# EAGLE board mv-uart (EAGLE 7.6.0)
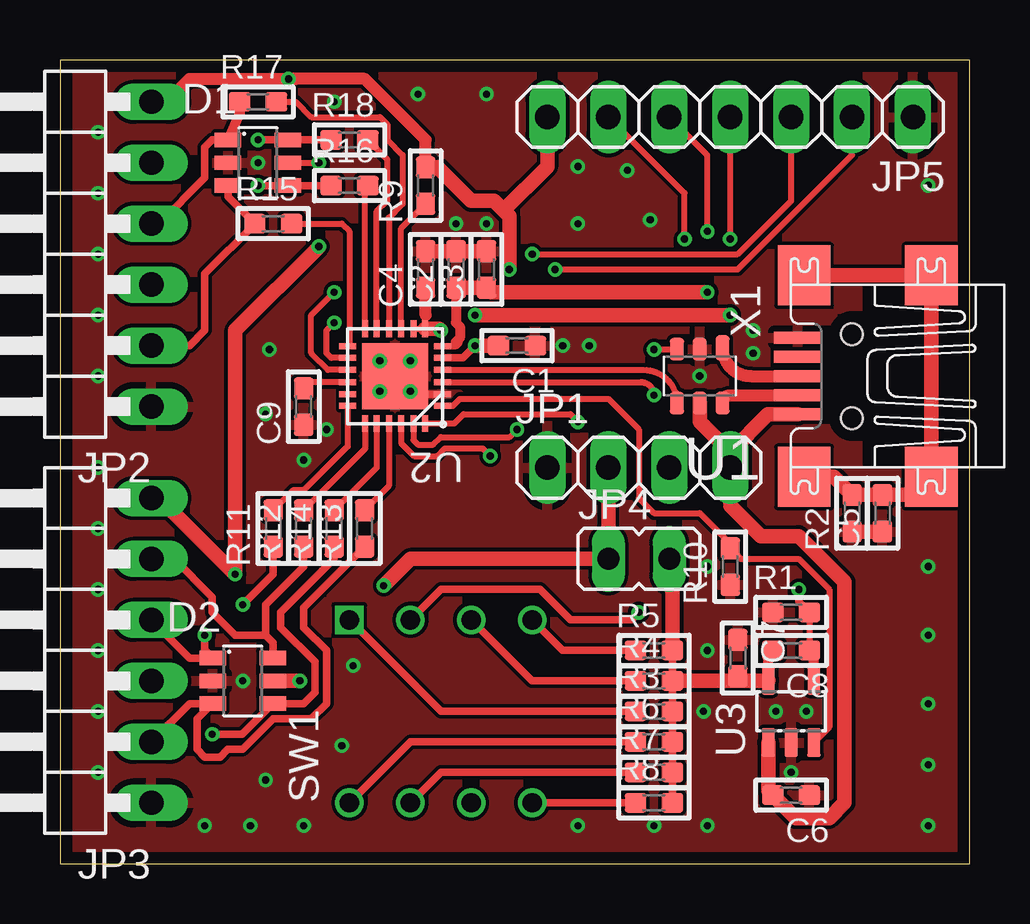
[diagram p0: board, top side]
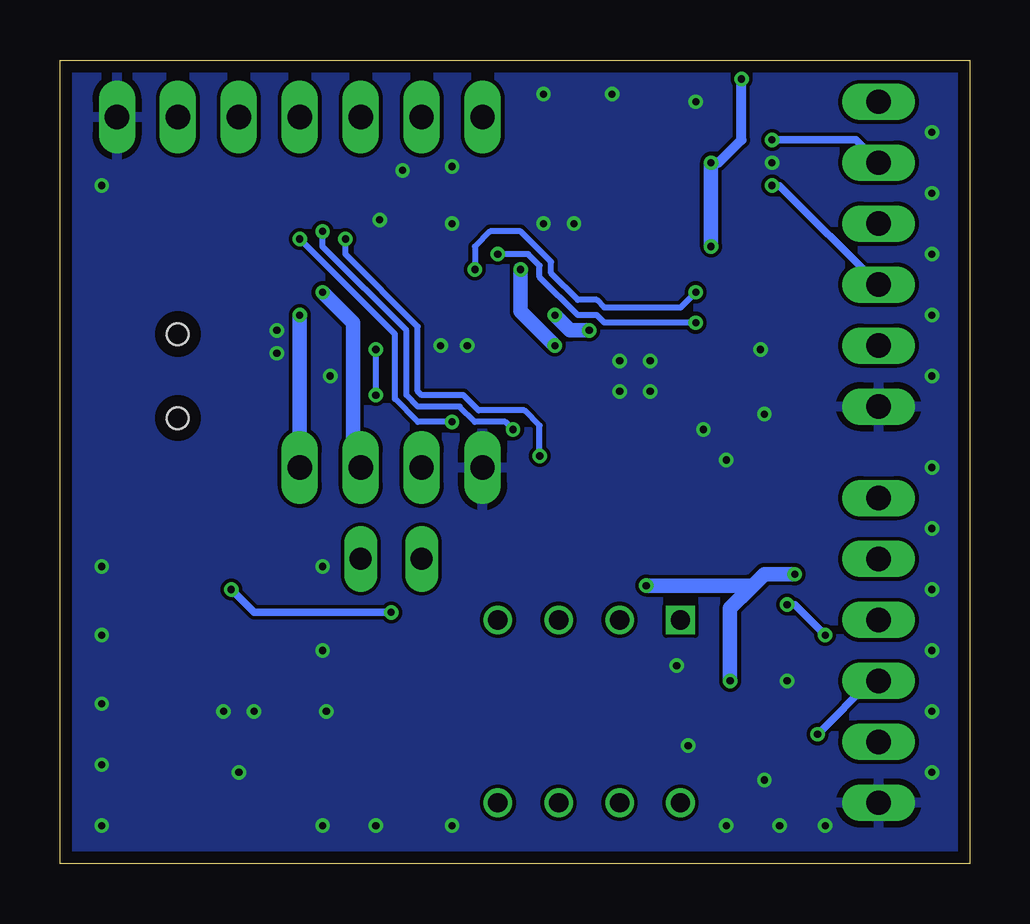
[diagram p1: board, bottom side, seen from below]

Size 37.94 x 33.49 mm. Coordinates in mm from the lower left corner, seen from the top.
Outline: 0,0 37.94,0 37.94,33.49 0,33.49 0,0
Copper layers (1*16): Top 0.035mm / dielectric 1.55mm / Bottom 0.035mm
Design rules "sysmocom-basista-4layer-prototype *": minimum track width 0.15mm, minimum drill 0.3mm, track to track 0.15mm, track to pad 0.15mm, pad to pad 0.15mm, via to via 0.15mm, smd to smd 0.15mm, copper to edge 0.5mm, drill to drill 0.36mm, minimum pad ring 0.15mm, minimum via ring 0.15mm, stop-mask expansion 0.15mm, vias tented up to drill 0mil, thermal gap 10mil

## Footprints (pad centres in the part's own frame; a part is rotated, then mirrored left to right if it is on the bottom)
_0603 = smd 0.9 x 0.8: 1 -0.762,0; 2 0.762,0
WE-TVS_SOT23-6L = smd 0.6 x 1.1: 1 -0.95,-1.25; 2 0,-1.25; 3 0.95,-1.25; 4 0.95,1.25; 5 0,1.25; 6 -0.95,1.25
1X04 = drill 1.016 long: 1 -3.81,0; 2 -1.27,0; 3 1.27,0; 4 3.81,0
1X06/90 = drill 1.016 long: 1 -6.35,-3.81; 2 -3.81,-3.81; 3 -1.27,-3.81; 4 1.27,-3.81; 5 3.81,-3.81; 6 6.35,-3.81
JP1 = drill 0.914 long: 1 0,-1.27; 2 0,1.27
1X07 = drill 1.016 long: 1 -7.62,0; 2 -5.08,0; 3 -2.54,0; 4 0,0; 5 2.54,0; 6 5.08,0; 7 7.62,0
DIP_SP6T = drill 0.8 square: 1 -3.81,3.81 | drill 0.8: 2 1.27,3.81; 3 3.81,3.81; 4 -3.81,-3.81; 5 -1.27,-3.81; 6 3.81,-3.81; C -1.27,3.81; C2 1.27,-3.81
TSOP-6 = smd 0.6 x 1.05: 1 -0.95,-1.175 | smd 0.6 x 0.95: 2 0,-1.125; 3 0.95,-1.125; 4 0.95,1.125; 5 0,1.125; 6 -0.95,1.125
QFN24_4X4 = smd 0.7 x 0.25: 1 -1.975,1.245; 2 -1.975,0.762; 3 -1.975,0.254; 4 -1.975,-0.254; 5 -1.975,-0.762; 6 -1.975,-1.245; 13 1.975,-1.245; 14 1.975,-0.762; 15 1.975,-0.254; 16 1.975,0.254; 17 1.975,0.762; 18 1.975,1.245 | smd 0.25 x 0.7: 7 -1.245,-1.975; 8 -0.762,-1.975; 9 -0.254,-1.975; 10 0.254,-1.975; 11 0.762,-1.975; 12 1.245,-1.975; 19 1.245,1.975; 20 0.762,1.975; 21 0.254,1.975; 22 -0.254,1.975; 23 -0.762,1.975; 24 -1.245,1.975 | smd 2.75 x 2.75: 25 0,0
SOT23L = smd 0.55 x 1.2: 1 -0.95,-1.3; 2 0,-1.3; 3 0.95,-1.3; 4 0.95,1.3; 5 -0.95,1.3
UX60-MB-5ST = smd 2 x 0.5: 1 2.25,1.6; 2 2.25,0.8; 3 2.25,0; 4 2.25,-0.8; 5 2.25,-1.6 | smd 2.2 x 2.5: M1 -3.3,-4.2; M2 -3.3,4.2; M3 2,4.2; M4 2,-4.2 | hole 0.9: 0,-1.75; 0,1.75

## Placement (x,y rotation side)
C1  100n  [_0603]  19.05,21.59 180 top
C2  100n  [_0603]  16.51,24.77 90 top
C3  2.2u  [_0603]  17.78,24.77 90 top
C4  1u  [_0603]  15.24,24.77 90 top
C5  100n  [_0603]  34.29,14.61 90 top
C6  1u  [_0603]  30.48,2.86 180 top
C7  1u  [_0603]  28.26,8.57 270 top
C8  1n  [_0603]  30.48,8.89 180 top
C9  4.7u  [_0603]  10.16,19.05 90 top
D1  WE-TVS_824013  [WE-TVS_SOT23-6L]  8.26,29.21 270 top
D2  WE-TVS_824013  [WE-TVS_SOT23-6L]  7.62,7.62 270 top
JP1  [1X04]  24.13,16.51 0 top
JP2  [1X06/90]  0,25.4 90 top
JP3  [1X06/90]  0,8.89 90 top
JP4  [JP1]  24.13,12.7 270 top
JP5  [1X07]  27.94,31.11 180 top
R1  18k  [_0603]  30.48,10.48 0 top
R2  1M  [_0603]  33.02,14.61 90 top
R3  22.6k  [_0603]  24.77,6.35 0 top
R4  34k  [_0603]  24.77,7.62 0 top
R5  38.3k  [_0603]  24.77,8.89 0 top
R6  45.3k  [_0603]  24.77,5.08 0 top
R7  49.9k  [_0603]  24.77,3.81 0 top
R8  56.2k  [_0603]  24.77,2.54 0 top
R9  4.7k  [_0603]  15.24,28.26 90 top
R10  10k  [_0603]  27.94,12.38 90 top
R11  47  [_0603]  8.89,13.97 90 top
R12  47  [_0603]  10.16,13.97 90 top
R13  47  [_0603]  12.7,13.97 90 top
R14  47  [_0603]  11.43,13.97 90 top
R15  47  [_0603]  8.89,26.67 0 top
R16  47  [_0603]  12.06,28.26 0 top
R17  47  [_0603]  8.26,31.75 0 top
R18  47  [_0603]  12.06,30.16 0 top
SW1  DIP_SP6T  [DIP_SP6T]  15.88,6.35 0 top
U1  IP4234CZ6  [TSOP-6]  26.67,20.32 180 top
U2  CP2105-GM  [QFN24_4X4]  13.97,20.32 180 top
U3  LDO_SHD_ADJ-AP2127K-ADJ  [SOT23L]  30.48,6.35 0 top
X1  MINI-USB-SHIELD-UX60-MB-5ST  [UX60-MB-5ST]  33.02,20.32 180 top

## Library data of the parts
C1-C9 R1-R18 = rc-sysmocom
D1 D2 = Wuerth_Elektronik_eiSos_V6_20140807
JP1-JP3 JP5 = pinhead
JP4 = jumper
SW1 = laforge
U1 = laforge; OC_DIGIKEY: 568-5869-1-ND
U2 = usb-uart; OC_DIGIKEY: 336-2009-5-ND
U3 = ldo
X1 = con-hirose; OC_FARNELL: unknown; OC_NEWARK: unknown

## Nets
!SUSPEND: R10.2 U2.1 U3.3
_USB_DN: U1.6 X1.2
_USB_DP: U1.1 X1.3
CTS_ECI: D1.1 JP2.4 R17.1
CTS_SCI: D2.1 JP3.4 R11.1
GND: C1.1 C2.2 C3.2 C4.2 C5.1 C6.1 C7.1 C9.1 D1.2 D2.2 JP1.1 JP2.1 JP3.1 JP5.1 R1.1 R2.1 R10.1 U1.2 U2.2 U2.25 U3.2 X1.5
GPIO.0_ECI: JP5.2 U2.15
GPIO.0_SCI: JP5.4 U2.24
GPIO.1_ECI: JP5.3 U2.14
GPIO.1_SCI: JP5.5 U2.23
GPIO.2_SCI: JP5.6 U2.22
N$1: R3.1 SW1.1
N$2: R4.1 SW1.2
N$3: R5.1 SW1.3
N$4: R6.1 SW1.4
N$5: C5.2 R2.2 X1.M1 X1.M2 X1.M3 X1.M4
N$6: R7.1 SW1.5
N$7: R8.1 SW1.6
N$8: R9.1 U2.9
N$9: C9.2 U2.16
N$10: R11.2 U2.18
N$11: R12.2 U2.19
N$12: R13.2 U2.21
N$13: R14.2 U2.20
N$14: R15.2 U2.13
N$15: C8.1 R1.2 SW1.C U3.4
N$16: R16.2 U2.12
N$17: R17.2 U2.10
N$18: R18.2 U2.11
RTS_ECI: D1.6 JP2.5 R18.1
RTS_SCI: D2.6 JP3.5 R12.1
RXD_ECI: D1.4 JP2.3 R16.1
RXD_SCI: D2.4 JP3.3 R14.1
TXD_ECI: D1.3 JP2.2 R15.1
TXD_SCI: D2.3 JP3.2 R13.1
USB_DN: U1.4 U2.4
USB_DP: U1.3 U2.3
USB_VBUS: C4.1 C6.2 JP1.4 U1.5 U2.7 U2.8 U3.1 X1.1
V_ADJ: C7.2 C8.2 JP4.2 R3.2 R4.2 R5.2 R6.2 R7.2 R8.2 U3.5
VDD_3V45: C2.1 C3.1 JP1.3 U2.6
VIO: C1.2 D1.5 D2.5 JP1.2 JP2.6 JP3.6 JP4.1 JP5.7 R9.2 U2.5

## Tracks (layer width: path | path; a pad name or v marks a point on that pad's centre or on a via)
!SUSPEND
  Top 0.254: U2.1 16.38,19.07 16.67,19.37 22.86,19.37 24.13,18.1 24.13,15.24 24.77,14.61 26.67,14.61 27.94,13.34 R10.2 28.38,12.7 30.8,12.7 32.07,11.43 32.07,5.69 U3.3
_USB_DN
  Top 0.5: U1.6 arc-90 27.95,19.52 X1.2
_USB_DP
  Top 0.5: U1.1 arc90 28.8,20.32 X1.3
CTS_ECI
  Top 0.307: JP2.4 4.13,26.67 6.03,28.57 6.03,29.84 6.35,30.16 D1.1
  Top 0.406: R17.1 7.49,31.28 D1.1
CTS_SCI  (via drill 0.3)
  Top 0.307: JP3.4 5.4,8.57 D2.1 6.03,8.91 v6.03,9.53 | v7.62,10.79 8.89,12.06 R11.1
  Bottom 0.307: v6.03,9.53 7.3,10.79 v7.62,10.79
GND  (via drill 0.3)
  Top 0.15: U2.25 v14.61,19.68
  Top 0.307: U2.2 14.73,19.56 v14.61,19.68
  Top 0.61: C5.1 R2.1 | C3.2 C2.2 C4.2
  other vias: 7.62,7.62 10.16,1.59 7.94,1.59 6.03,1.59 1.59,3.81 1.59,6.35 1.59,8.89 1.59,11.43 1.59,13.97 1.59,16.51 1.59,20.32 1.59,22.86 1.59,25.4 1.59,27.94 1.59,30.48 8.26,29.21 11.43,31.75 21.59,1.59 24.77,1.59 26.99,1.59 36.2,1.59 36.2,4.13 36.2,6.67 36.2,9.53 36.2,12.38 14.92,32.07 17.78,32.07 36.2,28.26 31.11,6.35 29.84,6.35 30.48,3.81 26.99,12.38 26.99,8.89 20.95,21.59 16.51,26.67 17.78,26.67 26.67,20.32 28.89,21.27 28.89,22.23 10.16,16.83 11.11,18.1 21.59,29.05 23.65,28.89 24.61,26.83 21.59,26.67 8.73,21.43 8.57,18.73 12.22,8.26 11.75,4.92 8.57,3.49 26.83,6.35 22.07,21.59 13.34,19.68 13.34,20.95 14.61,20.95
  pour Top: 0,33.66 38.1,33.66 38.1,0 0,0
  pour Bottom: 0,33.66 38.1,33.66 38.1,0 0,0
GPIO.0_ECI  (via drill 0.3)
  Top 0.254: U2.15 11.18,20.57 10.48,21.27 10.48,22.86 v11.43,23.81 | v20.64,24.77 28.26,24.77 33.02,29.53 JP5.2
  Bottom 0.254: v11.43,23.81 12.06,23.18 15.24,23.18 15.56,23.5 16.35,23.5 17.46,24.61 17.46,25.08 18.73,26.35 20,26.35 20.64,25.72 v20.64,24.77
GPIO.0_SCI  (via drill 0.3)
  Top 0.254: U2.24 16.44,18.34 16.83,18.73 21.27,18.73 v21.59,18.41 | v27.94,26.04 JP5.4
  Bottom 0.254: v21.59,18.41 23.02,18.41 23.97,19.37 23.97,22.07 v27.94,26.04
GPIO.1_ECI  (via drill 0.3)
  Top 0.254: U2.14 11.3,21.08 11.11,21.27 11.11,22.23 v11.43,22.54 | v19.68,25.4 28.26,25.4 30.48,27.62 JP5.3
  Bottom 0.254: v11.43,22.54 15.24,22.54 15.56,22.86 16.35,22.86 17.94,24.45 17.94,24.92 18.41,25.4 v19.68,25.4
GPIO.1_SCI  (via drill 0.3)
  Top 0.254: U2.23 14.73,17.65 14.92,17.46 15.56,17.46 15.88,17.78 18.73,17.78 v19.05,18.1 | v26.99,26.35 26.99,29.53 JP5.5
  Bottom 0.254: v19.05,18.1 19.37,18.41 20.64,18.41 21.27,19.05 23.02,19.05 23.5,19.53 23.5,22.23 26.99,25.72 v26.99,26.35
GPIO.2_SCI  (via drill 0.3)
  Top 0.254: U2.22 14.22,17.53 14.76,16.99 15.72,16.99 16.03,17.3 17.62,17.3 v17.94,16.99 | v26.04,26.04 26.04,27.94 JP5.6
  Bottom 0.254: v17.94,16.99 17.94,18.26 18.57,18.89 20.48,18.89 21.11,19.53 22.86,19.53 23.02,19.68 23.02,22.38 26.04,25.4 v26.04,26.04
N$1
  Top 0.307: SW1.1 15.88,6.35 R3.1
N$2
  Top 0.307: SW1.2 19.68,7.62 R4.1
N$3
  Top 0.307: SW1.3 20.95,8.89 R5.1
N$4
  Top 0.307: SW1.4 14.61,5.08 R6.1
N$5
  Top 0.61: X1.M3 32.27,16.12 R2.2 C5.2 35.57,15.37 X1.M2 X1.M1 X1.M4
N$6
  Top 0.307: SW1.5 15.88,3.81 R7.1
N$7
  Top 0.307: SW1.6 R8.1
N$8
  Top 0.254: U2.9 14.22,26.48 R9.1
N$9
  Top 0.254: U2.16 10.41,20.07 C9.2
N$10
  Top 0.254: U2.18 11.99,17.39 10.16,15.56 9.72,15.56 R11.2
N$11
  Top 0.254: U2.19 12.72,17.3 R12.2
N$12
  Top 0.254: U2.21 13.72,15.75 R13.2
N$13
  Top 0.254: U2.20 13.21,16.51 R14.2
N$14
  Top 0.254: R15.2 11.75,26.67 12.06,26.35 12.06,21.64 U2.13
N$15  (via drill 0.3)
  Top 0.254: R1.2 C8.1
  Top 0.307: SW1.C 15.88,11.43 20,11.43 21.27,10.16 23.81,10.16 v24.13,10.48 | v30.8,11.43 30.8,10.92 R1.2
  Top 0.406: U3.4 31.43,8.7 C8.1
  Bottom 0.307: v24.13,10.48 29.84,10.48 v30.8,11.43
N$16
  Top 0.254: U2.12 12.72,28.16 arc-90 R16.2
N$17
  Top 0.254: R17.2 9.84,31.75 10.48,31.11 13.34,31.11 13.65,30.8 13.65,30.16 14.29,29.53 14.29,27.5 13.72,26.92 U2.10
N$18
  Top 0.254: U2.11 13.21,27.18 13.65,27.62 13.65,29.34 R18.2
RTS_ECI  (via drill 0.3)
  Top 0.307: R18.1 D1.6 v8.26,30.16
  Bottom 0.307: JP2.5 4.76,30.16 v8.26,30.16
RTS_SCI
  Top 0.307: JP3.5 4.76,12.7 6.35,11.11 6.35,10.48 7.3,9.53 8.57,9.53 | 8.57,9.53 8.89,9.21 8.89,8.59 D2.6 | 8.57,9.53 8.57,10.79 10.16,12.38 R12.1
RXD_ECI  (via drill 0.3)
  Top 0.307: R16.1 D1.4 v8.26,28.26
  Bottom 0.307: JP2.3 7.94,28.26 v8.26,28.26
RXD_SCI  (via drill 0.3)
  Top 0.307: v6.35,5.4 7.6,5.4 D2.4 10.16,6.67 10.64,7.14 10.64,8.41 9.21,9.84 9.21,10.48 11.43,12.7 R14.1
  Bottom 0.307: JP3.3 4.13,7.62 v6.35,5.4
TXD_ECI
  Top 0.307: D1.3 7,27.79 R15.1 6.03,24.57 6.03,22.23 5.4,21.59 JP2.2
TXD_SCI
  Top 0.307: JP3.2 5.4,6.67 D2.3 6.35,6.67 5.71,6.03 5.71,4.76 6.03,4.45 6.67,4.45 6.99,4.76 7.62,4.76 8.89,6.03 10.48,6.03 11.11,6.67 11.11,8.89 10.16,9.84 10.16,10.67 R13.1
USB_DN
  Top 0.254: U2.4 24.34,20.57 arc-90 U1.4
USB_DP  (via drill 0.3)
  Top 0.254: U2.3 24.23,20.07 arc-90 v24.77,19.53 | v24.77,21.43 U1.3
  Bottom 0.254: v24.77,19.53 v24.77,21.43
USB_VBUS  (via drill 0.3)
  Top 0.254: 15.24,22.86 15.21,22.54 U2.7 U2.8
  Top 0.5: 15.24,22.86 C4.1
  Top 0.61: X1.1 29.52,18.72 27.94,17.14 | 27.94,17.14 JP1.4 27.94,14.92 29.21,13.65 30.8,13.65 32.7,11.75 32.7,2.54 32.07,1.91 30.67,1.91 C6.2 29.53,3.05 U3.1 | U1.5 26.67,18.41 27.94,17.14 | U2.7 15.8,22.3 v15.88,22.23 | v17.3,22.86 v27.94,22.86
  Bottom 0.61: v27.94,22.86 JP1.4 | v15.88,22.23 16.67,22.23 v17.3,22.86
V_ADJ
  Top 0.307: R8.2 R7.2 R6.2 R3.2 R4.2 R5.2
  Top 0.406: C8.2 29.53,8.7 U3.5 28.42,7.65 C7.2
  Top 0.61: JP4.2 25.53,12.57 R5.2 | R4.2 29.5,7.62 U3.5
VDD_3V45  (via drill 0.3)
  Top 0.254: U2.6 16.48,21.57 arc90 16.67,21.91
  Top 0.406: C2.1 16.51,22.54 16.67,22.38 16.67,21.91 16.51,21.75
  Top 0.61: C2.1 C3.1 17.97,23.81 v26.99,23.81
  Bottom 0.61: JP1.3 25.72,16.83 25.72,22.54 v26.99,23.81
VIO  (via drill 0.3)
  Top 0.254: U2.5 16.51,21.08 | D1.5 v10.79,29.21
  Top 0.307: U2.5 16.8,21.08 v17.3,21.59
  Top 0.5: JP2.6 4.45,31.75 5.4,32.7 v9.53,32.7 | v9.53,32.7 9.84,32.7 | R9.2 15.24,30.16 12.7,32.7 v9.53,32.7
  Top 0.61: JP3.6 4.13,15.24 v7.3,12.06 7.3,22.23 v10.79,25.72 | v10,7.62 D2.5 | R9.2 15.75,29.02 17.14,27.62 18.1,27.62 18.49,27.23 | 18.49,27.23 18.73,26.99 v18.73,24.77 | v17.3,21.59 C1.2 | JP5.7 20.32,29.05 18.49,27.23 | v13.49,11.59 14.61,12.7 JP4.1 JP1.2
  Bottom 0.406: v10.79,29.21 10.48,29.21 9.53,30.16 v9.53,32.7
  Bottom 0.61: v7.3,12.06 8.57,12.06 9.13,11.51 | 9.13,11.51 10,10.64 v10,7.62 | v18.73,24.77 18.73,23.02 v17.3,21.59 | v10.79,25.72 v10.79,29.21 | v13.49,11.59 9.21,11.59 9.13,11.51